# EAGLE board bekono2 (EAGLE 7.2.0)
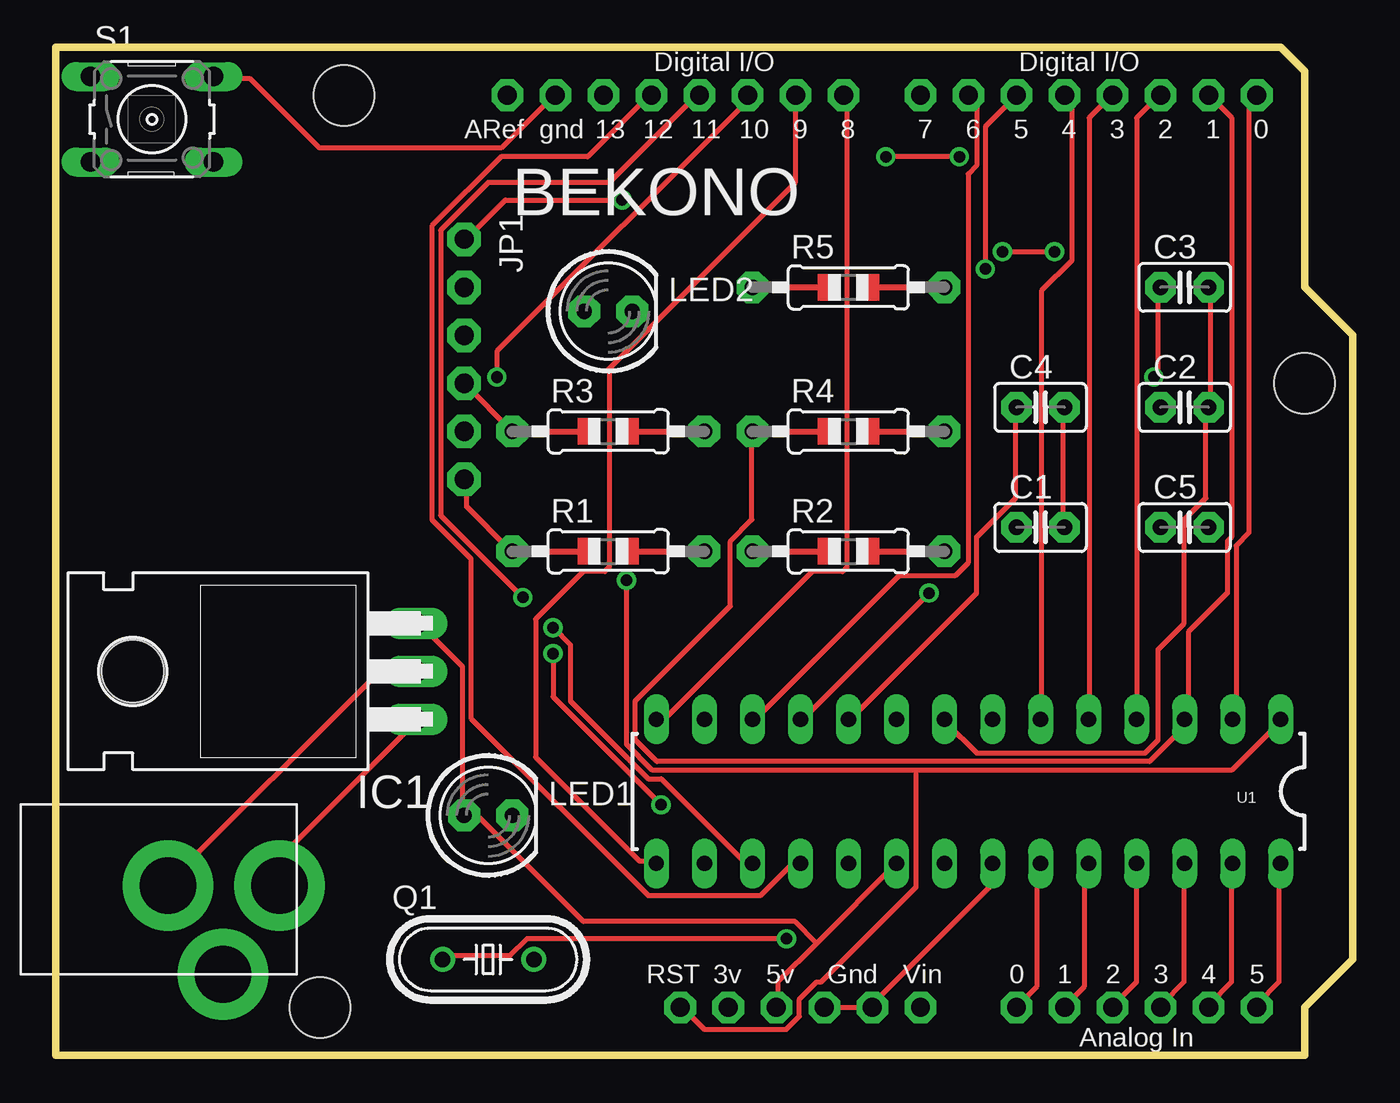
[diagram p0: board, top side]
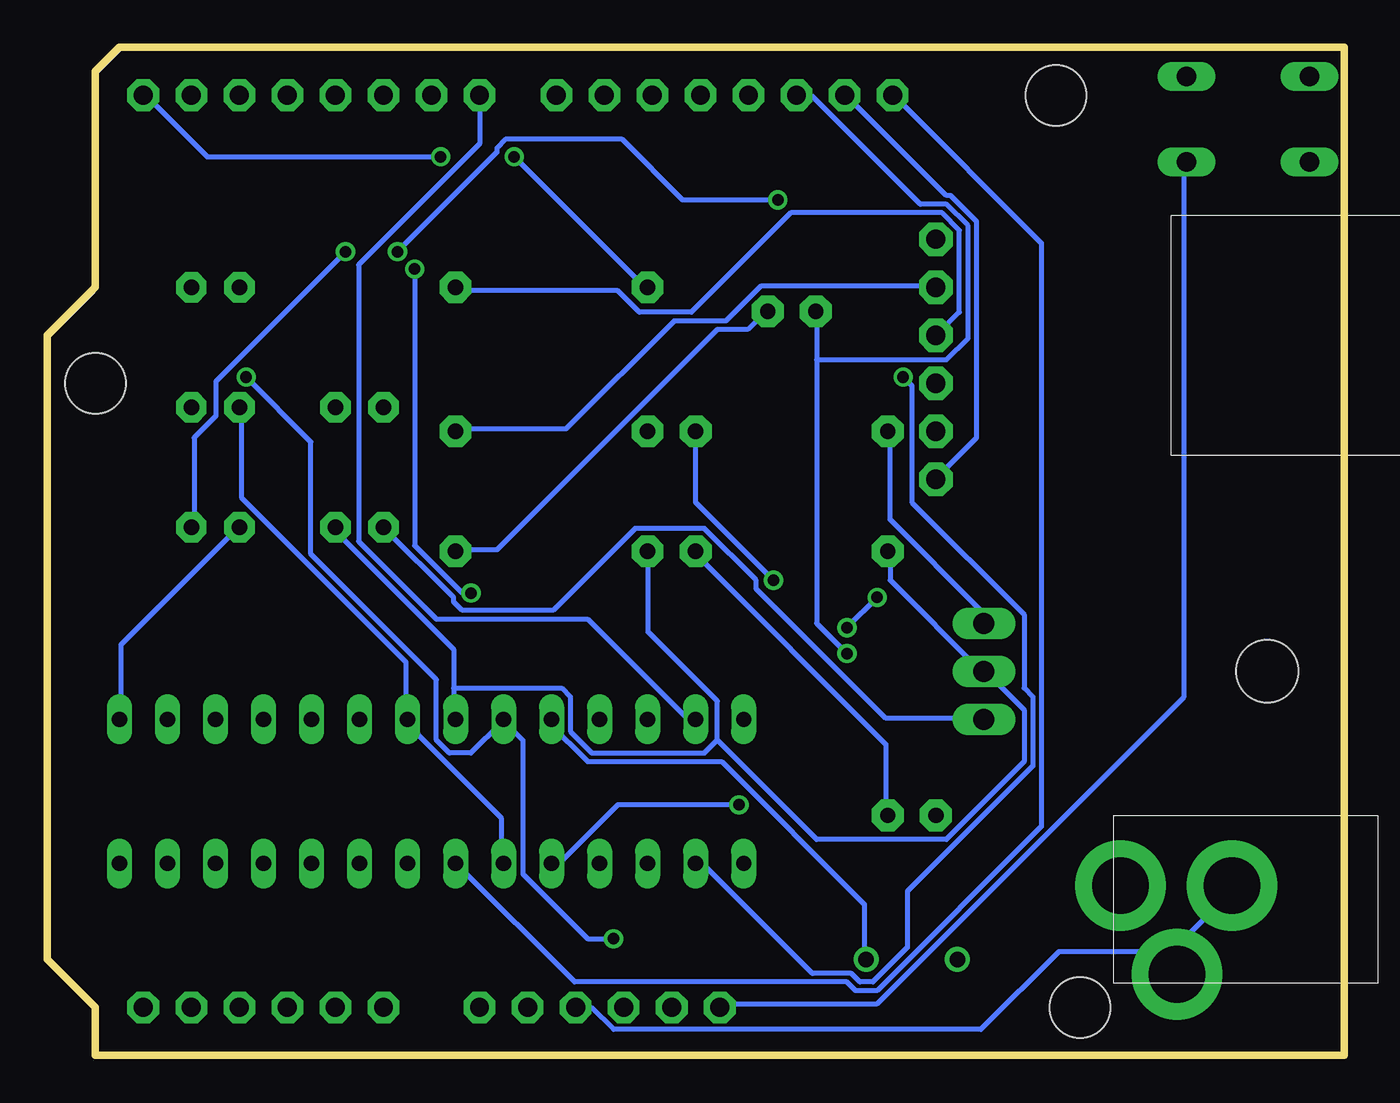
[diagram p1: board, bottom side, seen from below]

Size 68.58 x 53.34 mm. Coordinates in mm from the lower left corner, seen from the top.
Outline: 0,0 66.04,0 66.04,2.54 68.58,5.08 68.58,38.1 66.04,40.64 66.04,52.07 64.77,53.34 0,53.34 0,0
Copper layers (1*16): Top 0.035mm / dielectric 1.5mm / Bottom 0.035mm
Design rules "default": minimum track width 10mil, minimum drill 24mil, track to track 8mil, track to pad 8mil, pad to pad 8mil, via to via 8mil, smd to smd 8mil, copper to edge 40mil, drill to drill 8mil, minimum pad ring 10mil, minimum via ring 8mil, stop-mask expansion 4mil, vias tented up to drill 0mil, thermal gap 10mil

## Footprints (pad centres in the part's own frame; a part is rotated, then mirrored left to right if it is on the bottom)
C2.5-2 = drill 0.813 pad 1.6 octagon: 1 -1.27,0; 2 1.27,0
TO220H = drill 1.118 long: 1 -2.54,-10.16; 2 0,-10.16; 3 2.54,-10.16 | hole 3.302: 0,4.826
1X06-CLEANBIG = drill 1.016 pad 1.778 octagon: 1 -6.35,0; 2 -3.81,0; 3 -1.27,0; 4 1.27,0; 5 3.81,0; 6 6.35,0
LED5MM = drill 0.813 pad 1.676 octagon: A -1.27,0; K 1.27,0
HC49/S = drill 0.813: 1 -2.413,0; 2 2.413,0
0805-THM = drill 0.813 pad 1.676 octagon: 1 -5.08,0; 2 5.08,0
B3F-10XX = drill 1.016 long: 1 -3.251,2.261; 2 3.251,2.261; 3 -3.251,-2.261; 4 3.251,-2.261
DIL28-3 = drill 0.813 long: 1 -16.51,-3.81; 2 -13.97,-3.81; 3 -11.43,-3.81; 4 -8.89,-3.81; 5 -6.35,-3.81; 6 -3.81,-3.81; 7 -1.27,-3.81; 8 1.27,-3.81; 9 3.81,-3.81; 10 6.35,-3.81; 11 8.89,-3.81; 12 11.43,-3.81; 13 13.97,-3.81; 14 16.51,-3.81; 15 16.51,3.81; 16 13.97,3.81; 17 11.43,3.81; 18 8.89,3.81; 19 6.35,3.81; 20 3.81,3.81; 21 1.27,3.81; 22 -1.27,3.81; 23 -3.81,3.81; 24 -6.35,3.81; 25 -8.89,3.81; 26 -11.43,3.81; 27 -13.97,3.81; 28 -16.51,3.81
ARDUINO-BPLACE = drill 1 pad 1.676 octagon: 3V 35.56,2.54; 5V 38.1,2.54; A0 50.8,2.54; A1 53.34,2.54; A2 55.88,2.54; A3 58.42,2.54; A4 60.96,2.54; A5 63.5,2.54; AREF 23.876,50.8; D0 63.5,50.8; D1 60.96,50.8; D2 58.42,50.8; D3 55.88,50.8; D4 53.34,50.8; D5 50.8,50.8; D6 48.26,50.8; D7 45.72,50.8; D8 41.656,50.8; D9 39.116,50.8; D10 36.576,50.8; D11 34.036,50.8; D12 31.496,50.8; D13 28.956,50.8; GND 26.416,50.8; GND1 43.18,2.54; GND2 40.64,2.54; RESET 33.02,2.54; VIN 45.72,2.54 | hole 3.2: 15.24,50.8; 66.04,35.56; 13.97,2.54
PJ-102A = drill 3 pad 4.8: RING 0.1,-3.39; RING_SW -4.6,-6.29; TIP 0.1,-9.29

## Placement (x,y rotation side)
C1  0.1uf  [C2.5-2]  52.07,27.94 0 top
C2  0.33uf  [C2.5-2]  59.69,34.29 0 top
C3  33pf  [C2.5-2]  59.69,40.64 0 top
C4  33pf  [C2.5-2]  52.07,34.29 0 top
C5  1uf  [C2.5-2]  59.69,27.94 0 top
IC1  7805T  [TO220H]  8.89,20.32 90 top
JP1  [1X06-CLEANBIG]  21.59,36.83 270 top
LED1  [LED5MM]  22.86,12.7 0 top
LED2  [LED5MM]  29.21,39.37 0 top
Q1  [HC49/S]  22.86,5.08 0 top
R1  330  [0805-THM]  29.21,26.67 0 top
R2  330  [0805-THM]  41.91,26.67 0 top
R3  10K  [0805-THM]  29.21,33.02 0 top
R4  1K  [0805-THM]  41.91,33.02 0 top
R5  1K  [0805-THM]  41.91,40.64 0 top
S1  [B3F-10XX]  5.08,49.53 0 top
U1  ATMEGA328P_PDIP  [DIL28-3]  48.26,13.97 180 top
U$1  ARDUINO-BPLACE  [ARDUINO-BPLACE]  0,0 0 top
U$2  2.1MMJACKTHM  [PJ-102A]  2.54,8.89 90 top

## Library data of the parts
C1-C5 = capacitor-wima
IC1 JP1 LED1 LED2 R1-R5 U$1 U$2 = adafruit
Q1 = adafruit; OC_FARNELL: 1667008; OC_NEWARK: unknown
S1 = switch-omron; MPN: B3F-1000; OC_FARNELL: 176432; OC_NEWARK: 36M3542
U1 = SparkFun-DigitalIC

## Nets
3V: U$1.3V
+5V: C2.1 IC1.3 JP1.4 LED1.A R3.1 U1.7 U1.20 U$1.5V
AREF: U1.21 U$1.AREF
GND: C1.2 C2.2 C3.2 C4.2 IC1.2 JP1.6 R1.1 R2.1 S1.2 U1.8 U1.22 U$1.GND U$1.GND1 U$1.GND2 U$2.RING U$2.RING_SW
N$1: C1.1 IC1.1 U$2.TIP
N$2: LED1.K R1.2
N$3: LED2.K R2.2
N$4: C5.2 JP1.1
N$5: JP1.2 R4.2
N$7: JP1.3 R5.2
PB0: U1.14 U$1.D8
PB1: U1.15 U$1.D9
PB2: U1.16 U$1.D10
PB3: U1.17 U$1.D11
PB4: U1.18 U$1.D12
PB5: LED2.A U1.19 U$1.D13
PB6: C3.1 Q1.1 U1.9
PB7: C4.1 Q1.2 U1.10
PC0: U1.23 U$1.A0
PC1: U1.24 U$1.A1
PC2: U1.25 U$1.A2
PC3: U1.26 U$1.A3
PC4: U1.27 U$1.A4
PC5: U1.28 U$1.A5
PC6: C5.1 R3.2 S1.4 U1.1 U$1.RESET
PD0: R5.1 U1.2 U$1.D0
PD1: R4.1 U1.3 U$1.D1
PD2: U1.4 U$1.D2
PD3: U1.5 U$1.D3
PD4: U1.6 U$1.D4
PD5: U1.11 U$1.D5
PD6: U1.12 U$1.D6
PD7: U1.13 U$1.D7
VIN: U$1.VIN

## Tracks (layer width: path | path; a pad name or v marks a point on that pad's centre or on a via)
+5V
  Top 0.254: JP1.4 R3.1 | IC1.3 19.2,22.86 21.49,20.57 21.49,12.8 LED1.A 21.72,12.57 22.4,12.57 27.89,7.09 39.09,7.09 40.23,5.94 | U1.20 40.23,5.94 | 40.23,5.94 38.18,3.89 38.18,2.74 U$1.5V
  Bottom 0.254: R3.1 24,32.92 24,28.35 19.2,23.55 19.2,22.86 IC1.3 | U1.20 44.58,10.29 44.58,12.57 49.61,17.6 U1.7 49.61,17.83 49.61,20.8 58.29,29.49 58.29,34.29 C2.1
AREF
  Bottom 0.254: U1.21 46.86,10.06 40.69,3.89 26.29,3.89 25.83,3.43 24.69,3.43 16,12.12 16,42.98 23.77,50.75 U$1.AREF
GND
  Top 0.254: U1.22 49.38,10.06 49.38,8.91 43.2,2.74 U$1.GND1 42.98,2.52 40.69,2.52 U$1.GND2 | C3.2 61.04,40.46 61.04,34.29 C2.2 60.81,34.29 60.81,29.49 59.66,28.35 59.66,22.86 58.29,21.49 58.29,16.69 57.61,16 48.69,16 47.09,17.6 U1.8 | C4.2 53.26,34.29 53.26,28.12 C1.2 | S1.2 8.46,51.66 10.29,51.66 13.95,48.01 23.55,48.01 26.29,50.75 U$1.GND | JP1.6 21.72,30.4 21.72,29.03 24,26.75 R1.1 | IC1.2 18.97,20.12 16.92,20.12 5.94,9.14 U$2.RING
  Bottom 0.254: 9.6,5.03 8.91,4.34 U$2.RING_SW 9.6,5.03 | 9.6,5.03 10.06,5.49 15.09,5.49 19.2,1.37 38.63,1.37 39.78,2.52 40.46,2.52 U$1.GND2 | 47.09,19.43 47.09,21.49 53.49,27.89 C1.2 | 47.09,19.43 47.09,17.83 U1.8 | 33.15,16.69 33.15,18.75 36.8,22.4 36.8,26.52 R2.1 | 33.15,16.69 33.83,16 39.78,16 40.92,17.14 40.92,18.97 41.38,19.43 47.09,19.43 | R1.1 24,26.52 24,25.15 19.2,20.34 IC1.2 18.97,20.34 16.92,18.29 16.92,15.54 21.03,11.43 27.89,11.43 33.15,16.69 | U$1.GND 26.29,50.75 21.03,45.49 20.8,45.49 19.43,44.12 19.43,32.69 21.49,30.63 JP1.6 | 9.6,5.03 5.71,8.91 U$2.RING
N$1
  Top 0.254: U$2.TIP 11.89,9.14 11.89,10.52 18.97,17.6 IC1.1
  Bottom 0.254: C1.1 47.09,24.23 47.09,24 46.63,23.55 41.83,23.55 37.49,27.89 33.83,27.89 31.09,25.15 31.09,24.69 24.23,17.83 19.2,17.83 IC1.1
N$2
  Bottom 0.254: LED1.K 24.23,12.8 24.23,16.46 34.29,26.52 R1.2
N$3
  Bottom 0.254: R2.2 46.86,26.75 44.81,26.75 33.15,38.41 31.55,38.41 30.63,39.32 LED2.K
N$4  (via drill 0.61)
  Top 0.254: v50.06,42.52 v52.81,42.52 | v29.95,45.26 23.77,45.26 21.72,43.2 JP1.1
  Bottom 0.254: v52.81,42.52 59.66,35.66 59.66,33.83 60.81,32.69 60.81,28.12 C5.2 | v50.06,42.52 44.81,47.78 44.81,48.01 44.35,48.46 38.18,48.46 34.98,45.26 v29.95,45.26
N$5
  Bottom 0.254: R4.2 46.86,33.15 41.15,33.15 35.43,38.86 32.69,38.86 30.86,40.69 21.72,40.69 JP1.2
N$7
  Bottom 0.254: R5.2 46.86,40.46 38.41,40.46 37.26,39.32 34.52,39.32 29.26,44.58 21.26,44.58 20.34,43.66 20.34,39.32 21.49,38.18 JP1.3
PB0
  Top 0.254: U1.14 31.77,17.83 32.23,17.83 40.01,25.6 41.6,25.6 41.83,25.83 41.83,50.75 U$1.D8
PB1
  Top 0.254: U1.15 31.55,10.29 30.86,10.29 25.38,15.77 25.38,23.09 27.89,25.6 29.03,25.6 29.26,25.83 29.26,36.35 39.09,46.18 39.09,50.75 U$1.D9
PB2  (via drill 0.61)
  Top 0.254: v23.32,35.89 23.32,37.26 36.58,50.52 U$1.D10
  Bottom 0.254: v23.32,35.89 22.86,35.43 22.86,29.26 16.92,23.32 16.92,19.43 16.46,18.97 16.46,15.32 23.09,8.69 23.09,5.71 24.92,3.89 25.6,3.89 26.06,4.34 28.12,4.34 33.83,10.06 34.29,10.06 U1.16
PB3  (via drill 0.61)
  Top 0.254: v26.29,22.63 27.2,21.72 27.2,18.75 31.32,14.63 32,14.63 36.35,10.29 36.8,10.29 U1.17 | v24.69,24.23 20.34,28.57 20.34,43.66 22.86,46.18 29.26,46.18 33.83,50.75 U$1.D11
  Bottom 0.254: v24.69,24.23 v26.29,22.63
PB4
  Top 0.254: U1.18 39.32,10.06 38.86,10.06 37.26,8.46 31.32,8.46 21.95,17.83 21.95,26.29 19.89,28.35 19.89,43.89 23.55,47.55 28.12,47.55 31.32,50.75 U$1.D12
PB5  (via drill 0.61)
  Top 0.254: v32,13.26 26.29,18.97 v26.29,21.26
  Bottom 0.254: v32,13.26 38.41,13.26 41.38,10.29 41.83,10.29 U1.19 | v26.29,21.26 27.89,22.86 27.89,36.8 | 27.89,36.8 27.89,39.32 LED2.A | 27.89,36.8 21.03,36.8 19.89,37.95 19.89,43.89 21.03,45.03 22.4,45.03 28.12,50.75 28.8,50.75 U$1.D13
PB6  (via drill 0.61)
  Top 0.254: v38.63,6.17 24.92,6.17 24,5.26 20.57,5.26 Q1.1 | v58.06,35.89 58.29,36.12 58.29,40.46 C3.1
  Bottom 0.254: v38.63,6.17 40.01,6.17 43.43,9.6 43.43,16.69 44.35,17.6 U1.9 44.58,17.6 46.18,16 47.32,16 48.01,16.69 48.01,19.89 54.63,26.52 54.63,32.46 v58.06,35.89
PB7
  Top 0.254: C4.1 50.75,34.29 50.75,29.49 48.69,27.43 48.69,24.46 42.06,17.83 U1.10
  Bottom 0.254: Q1.2 25.38,5.26 25.38,8 32.92,15.54 40.01,15.54 42.06,17.6 U1.10
PC0
  Top 0.254: U1.23 51.89,10.06 51.89,3.66 50.98,2.74 U$1.A0
PC1
  Top 0.254: U1.24 54.41,10.06 54.41,3.66 53.49,2.74 U$1.A1
PC2
  Top 0.254: U1.25 57.15,3.89 56.01,2.74 U$1.A2
PC3
  Top 0.254: U1.26 59.66,10.06 59.66,3.89 58.52,2.74 U$1.A3
PC4
  Top 0.254: U1.27 62.18,10.06 62.18,3.89 61.04,2.74 U$1.A4
PC5
  Top 0.254: U1.28 64.69,10.06 64.69,3.89 63.55,2.74 U$1.A5
PC6  (via drill 0.61)
  Top 0.254: v30.18,25.15 30.18,16.46 31.55,15.09 45.49,15.09 | 45.49,15.09 62.18,15.09 64.69,17.6 U1.1 | 45.49,15.09 45.49,8.91 40.46,3.89 40.23,3.89 39.32,2.97 39.32,2.06 38.63,1.37 34.29,1.37 33.15,2.52 U$1.RESET
  Bottom 0.254: U1.1 64.69,17.83 64.69,21.72 58.52,27.89 C5.1 | R3.2 34.29,29.26 v30.18,25.15 | S1.4 8.46,47.09 8.46,18.97 24.69,2.74 32.92,2.74 U$1.RESET
PD0  (via drill 0.61)
  Top 0.254: U1.2 62.41,17.83 62.41,26.98 63.09,27.66 63.09,50.52 63.32,50.75 U$1.D0 | v47.78,47.55 v43.89,47.55
  Bottom 0.254: v43.89,47.55 37.03,40.69 R5.1 | v47.78,47.55 60.12,47.55 63.32,50.75 U$1.D0
PD1
  Top 0.254: U$1.D1 61.04,50.75 62.18,49.61 62.18,27.43 61.95,27.2 61.95,24.46 59.89,22.4 59.89,17.83 U1.3 59.89,17.6 57.84,15.54 31.77,15.54 30.63,16.69 30.63,18.75 35.66,23.77 35.66,27.2 36.8,28.35 36.8,32.92 R4.1
PD2
  Top 0.254: U1.4 57.15,49.61 58.29,50.75 U$1.D2
PD3
  Top 0.254: U1.5 54.63,17.83 54.63,49.61 55.78,50.75 U$1.D3
PD4
  Top 0.254: U1.6 52.12,17.83 52.12,40.46 53.72,42.06 53.72,50.52 53.49,50.75 U$1.D4
PD5  (via drill 0.61)
  Top 0.254: v46.18,24.46 39.55,17.83 U1.11 | v49.15,41.6 49.15,49.15 U$1.D5
  Bottom 0.254: v46.18,24.46 46.63,24.46 49.15,26.98 v49.15,41.6
PD6
  Top 0.254: U1.12 37.03,17.83 44.58,25.38 47.55,25.38 48.23,26.06 48.23,46.63 48.69,47.09 48.69,50.52 48.46,50.75 U$1.D6
PD7
  Bottom 0.254: U$1.D7 45.72,48.23 52.12,41.83 52.12,27.2 48.01,23.09 40.01,23.09 34.75,17.83 34.29,17.83 U1.13

## Text on the board
tPlace: BEKONO